# Altium PCB PCB1.PcbDoc
Units mil, origin at the board's own origin, x right, y up, seen from the top; angles counter-clockwise.
Board outline 2677.17 x 1968.5 mil, 2 copper layers (Top Layer, Bottom Layer); 33 components, 50 nets, 227 pads, 85 vias.
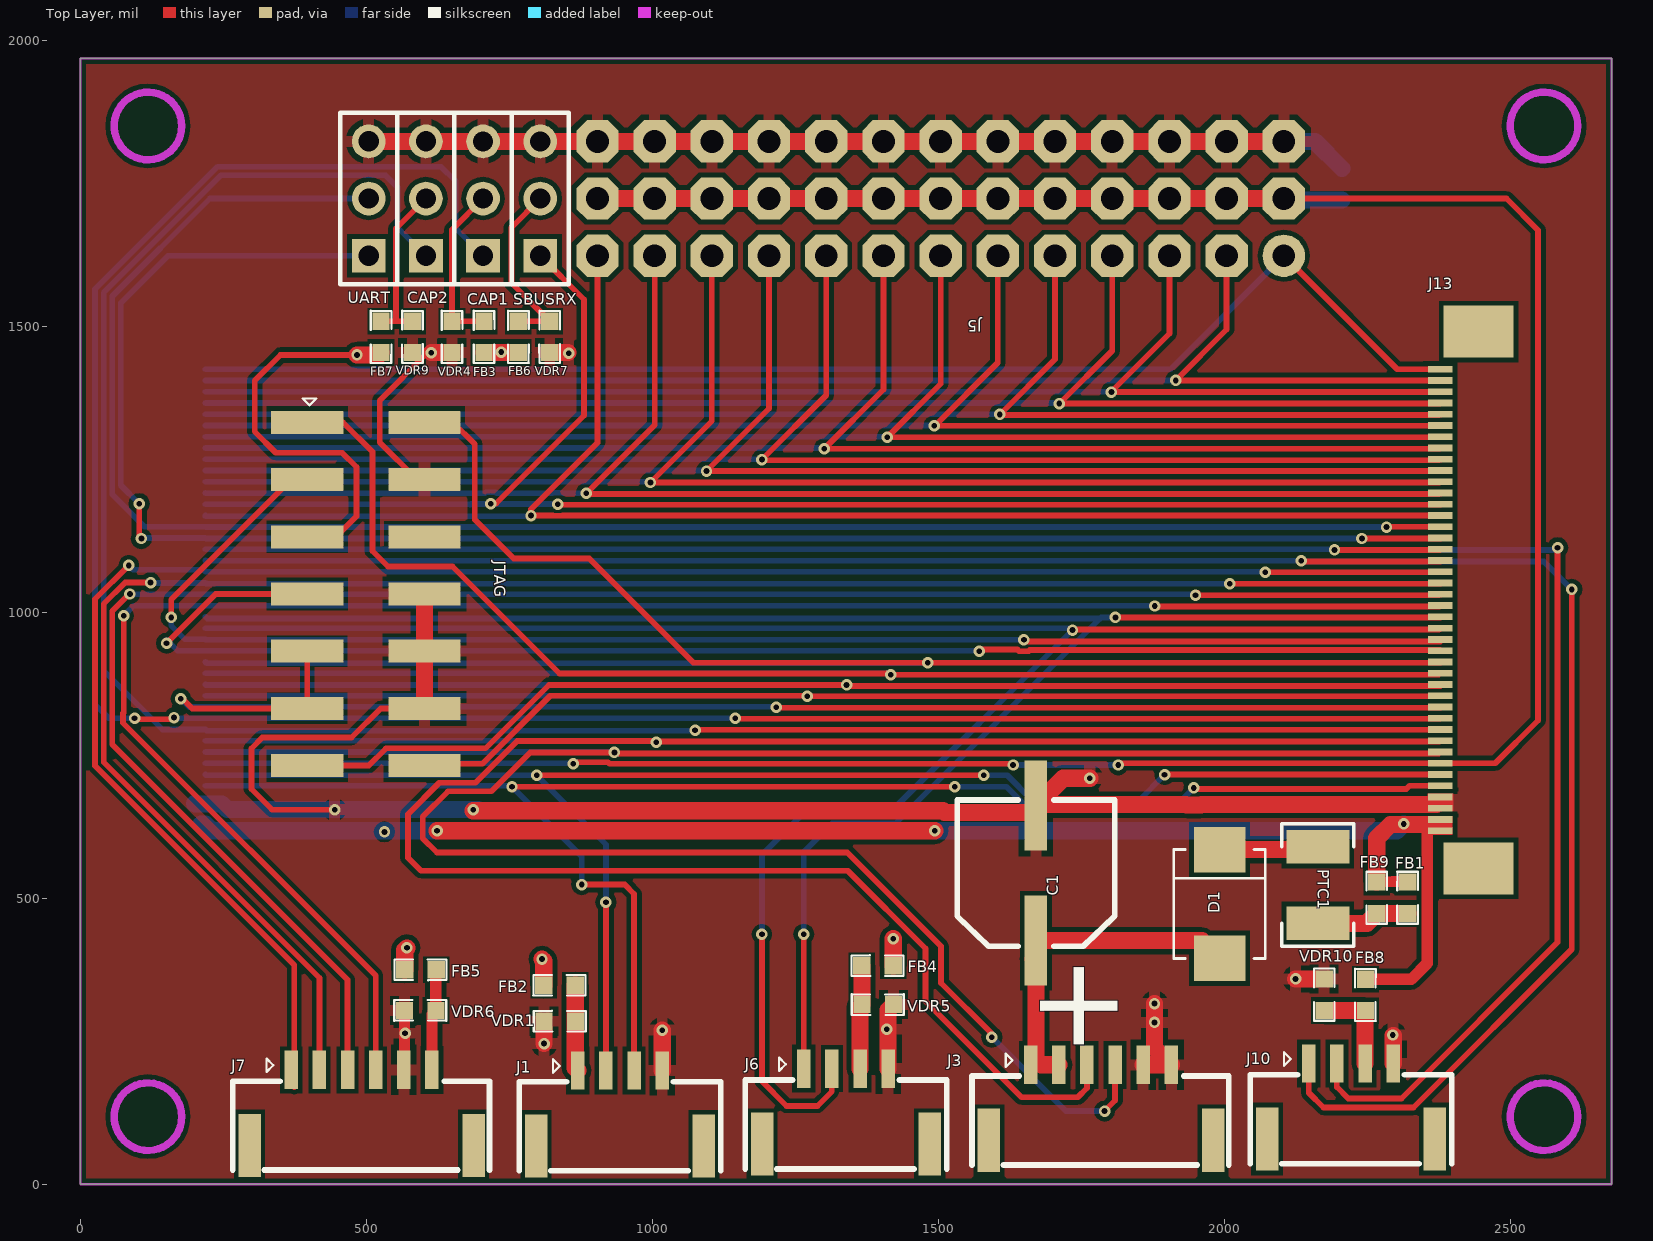
[diagram p0: Top Layer view]
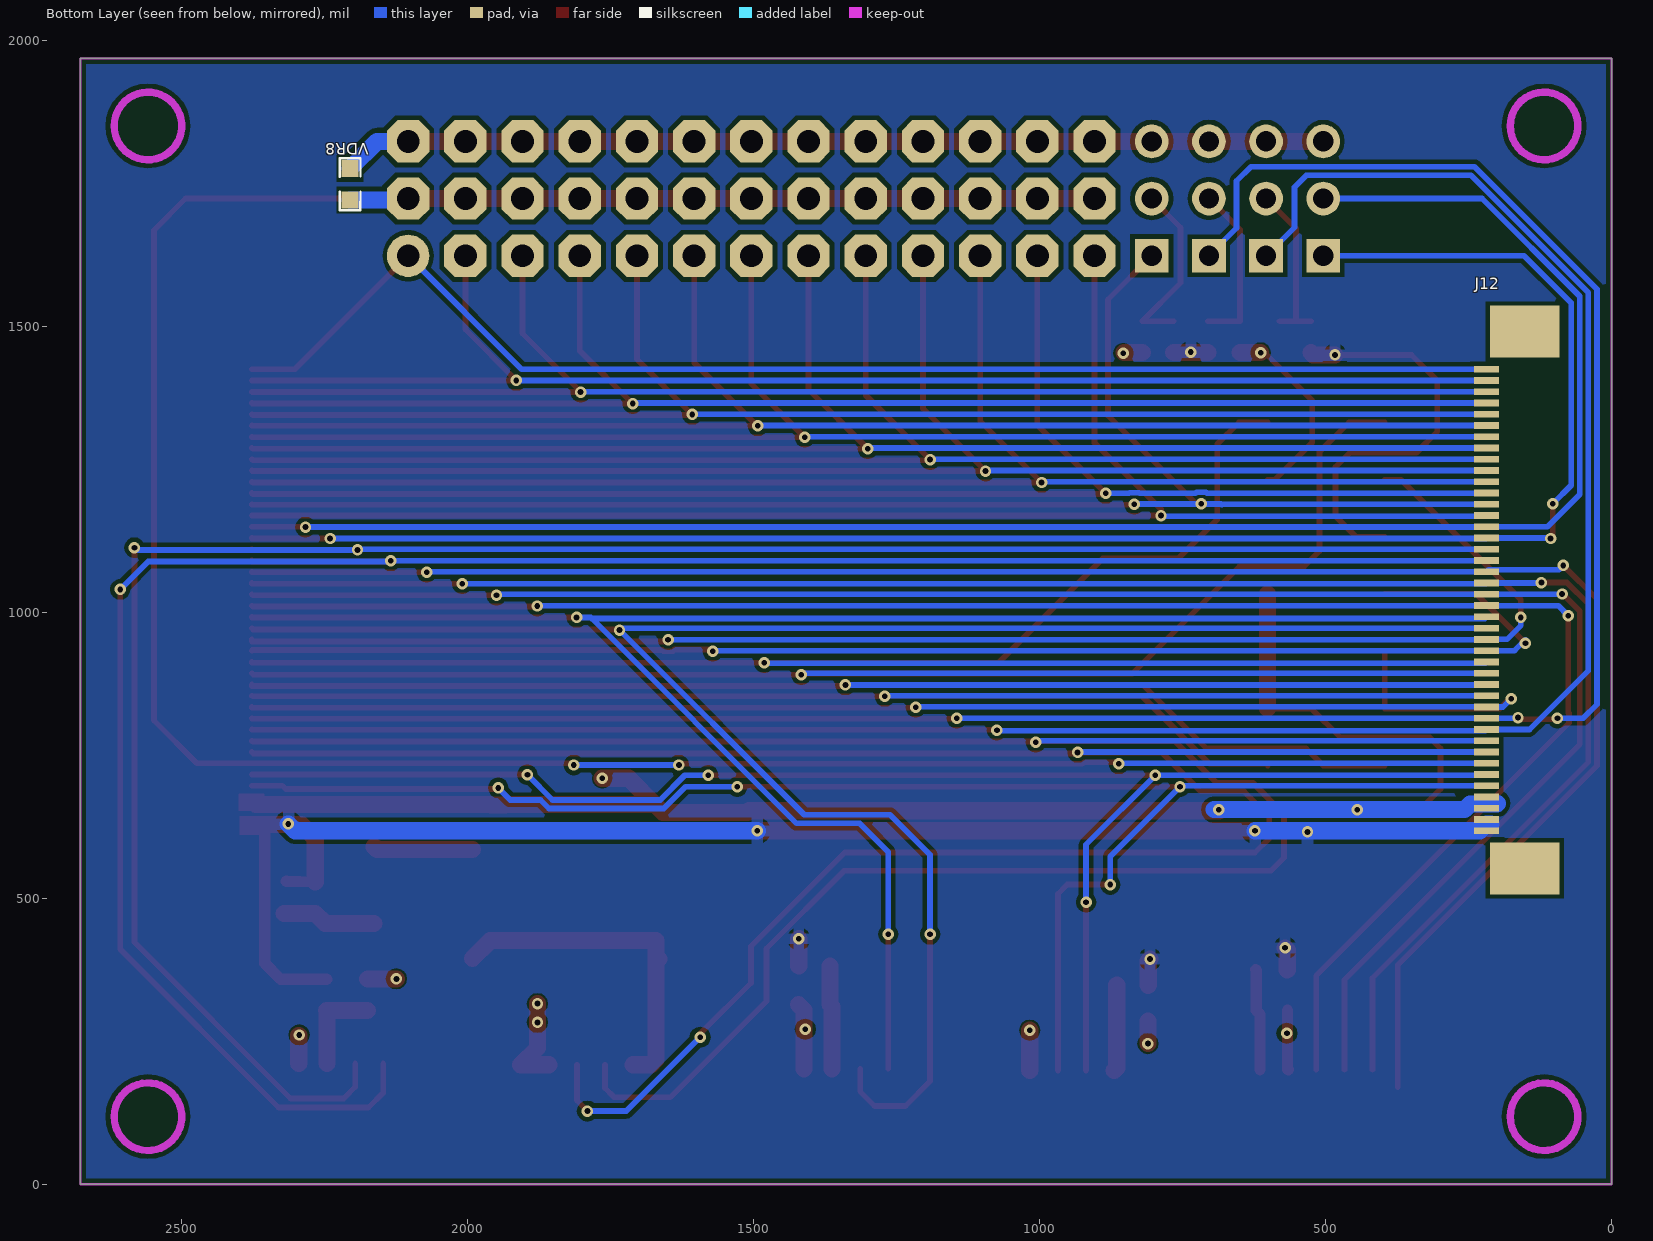
[diagram p1: Bottom Layer view, seen from below]

## Layer stack, top to bottom
Top Solder: solder mask 0.4, Solder Resist, Dk 3.5
Top Layer: signal copper 1.4
Dielectric 1: dielectric 12.6, FR-4, Dk 4.8
Bottom Layer: signal copper 1.4
Bottom Solder: solder mask 0.4, Solder Resist, Dk 3.5

## Board outline
0,0 0,1968.5 2677.17,1968.5 2677.17,0

## Design rules (kind name [scope] priority, off if disabled: settings)
Clearance [All] p1: gap=5
HoleToHoleClearance [All] p1: gap=0 allowstackedmicrovias=TRUE
MinimumSolderMaskSliver [All] p1: minsoldermaskwidth=0
PlaneConnect [All] p1: planeconnectstyle=Relief reliefexpansion=20 reliefentries=4 reliefconductorwidth=20 reliefairgap=10
PolygonConnect [All] p1: connectstyle=Relief reliefconductorwidth=20 reliefentries=4 polygonreliefangle="90 Angle" airgapwidth=10
RoutingVias [All] p1: holewidth=10 width=20 viastyle="Through Hole" minholewidth=10 minwidth=20 maxholewidth=10 maxwidth=20
SilkToSilkClearance [All] p1: silktosilkclearance=0
SilkToSolderMaskClearance [IsPad] p1: minsilkscreentomaskgap=0 clearancetoexposedcopper=TRUE
SolderMaskExpansion [All] p1: expansion=4
UnpouredPolygon [All] p1: allowunpoured=FALSE
Width [All] p1: maxlimit=30 minlimit=10 preferedwidth=10
24 further rules are at their usual default settings.

## Components (designator, comment, footprint, x,y, rotation, side; value= is the part's Value field where it differs from the comment)
C1 "220uF/16V" 6.3*7.7/H/220u 1670.65,544.06 r270 top
CAP1 "CAP1" SIP3 704.05,1623.42 r90 top (schematic designator J4)
CAP2 "CAP2" SIP3 604.06,1623.43 r90 top (schematic designator J9)
D1 "SK52B" SMB/DO-214AA 1991.65,395.06 r90 top
FB1 "742792625" 0603-FB 2320.65,501.06 r90 top
FB2 "742792625" 0603-FB 837.65,348.06 r180 top
FB3 "742792625" 0603-FB 705.65,1481.56 r270 top
FB4 "742792625" 0603-FB 1393.65,382.06 r0 top
FB5 "742792625" 0603-FB 594.65,375.06 r180 top
FB6 "742792625" 0603-FB 765.65,1481.56 r270 top
FB7 "742792625" 0603-FB 525.65,1481.56 r270 top
FB8 "742792625" 0603-FB 2246.65,331.06 r90 top
FB9 "742792625" 0603-FB 2266.65,501.06 r90 top
J1 "CAN" GH1.25-4 869.65,199.06 r0 top
J3 "POWER_5V" GH1.25-6 1661.39,208.85 r0 top
J5 "HEAD3X12" 3X13RA 1455.82,2184.8 r270 top
J6 "I2C" GH1.25-4 1264.65,202.06 r0 top
J7 "iSensor" GH1.25-6 368.65,200.06 r0 top
J10 "UART" GH1.25-4 2147.65,211.06 r0 top
J12 "HEAD1X42" FPC0.5-42 218.65,618.06 r90 bottom
J13 "HEAD1X42" FPC0.5-42 2377.65,618.06 r90 top
JTAG "JTAG" IDC14-SMD 396.65,1332.06 r0 top (schematic designator J11)
PTC1 "0ZCH0150FF2E" 1210 2163.65,590.06 r270 top
SBUSRX "SBUS" SIP3 804.05,1623.42 r90 top (schematic designator J8)
UART "UART" SIP3 504.06,1623.43 r90 top (schematic designator J2)
VDR1 "82536040" 0603R 810.65,285.06 r0 top
VDR4 "82536040" 0603R 649.65,1509.06 r270 top
VDR5 "82536040" 0603R 1421.65,314.06 r180 top
VDR6 "82536040" 0603R 566.65,304.06 r0 top
VDR7 "82536040" 0603R 820.65,1454.04 r90 top
VDR8 "82536070/9V" 0603R 2205.65,1776.06 r270 bottom
VDR9 "82536040" 0603R 580.65,1454.04 r90 top
VDR10 "82536040" 0603R 2174.65,359.06 r270 top

## Footprints (in the part's own frame and the unit in brackets; to place one, negate y for a bottom-side part, rotate by r counter-clockwise, add the part's x,y. Pads: shape width x height; smd on the part's side, far side on the other; paste and mask are expansions set on the pad)
3X13RA [mil]
  round 74 hole 40: 1(561.38,648.23)
  oct 74x74 hole 40: 2(461.38,648.23) 3(361.38,648.23) 4(561.38,548.23) 5(461.38,548.23) 6(361.38,548.23) 7(561.38,448.23) 8(461.38,448.23) 9(361.38,448.23) 10(561.38,348.23) 11(461.38,348.23) 12(361.38,348.23) 13(561.38,248.23) 14(461.38,248.23) 15(361.38,248.23) 16(561.38,148.23) 17(461.38,148.23) 18(361.38,148.23) 19(561.38,48.23) 20(461.38,48.23) 21(361.38,48.23) 22(561.38,-51.77) 23(461.38,-51.77) 24(361.38,-51.77) 25(561.38,-151.77) 26(461.38,-151.77) 27(361.38,-151.77) 28(561.38,-251.77) 29(461.38,-251.77) 30(361.38,-251.77) 31(561.38,-351.77) 32(461.38,-351.77) 33(361.38,-351.77) 34(561.38,-451.77) 35(461.38,-451.77) 36(361.38,-451.77) 37(561.38,-551.77) 38(461.38,-551.77) 39(361.38,-551.77)
6.3*7.7/H/220u [mm]
  rect 4x1 smd: 1(3,0) 2(-3,0)
  silkscreen extent -3.25,-3.5 3.25,3.5
0603-FB [mil]
  rect 30x30 smd: 1(-27.5,0) 2(27.5,0)
  silkscreen extent -46,-18 46,18
0603R [mil]
  rect 30x30 smd: 1(0,0) 2(55,0)
  silkscreen extent -18,-18 73,18
1210 [mm]
  rect 1.5x2.8 smd: 1(0,0) 2(3.4,0)
  silkscreen extent -1.02,-1.6 4.42,1.6
FPC0.5-42 [mm]
  rect 2.3x3.1 smd: 0(-1.67,-1.7) 0(22.17,-1.7)
  rect 0.3x1.1 smd: 1(0,0) 2(0.5,0) 3(1,0) 4(1.5,0) 5(2,0) 6(2.5,0) 7(3,0) 8(3.5,0) 9(4,0) 10(4.5,0) 11(5,0) 12(5.5,0) 13(6,0) 14(6.5,0) 15(7,0) 16(7.5,0) 17(8,0) 18(8.5,0) 19(9,0) 20(9.5,0) 21(10,0) 22(10.5,0) 23(11,0) 24(11.5,0) 25(12,0) 26(12.5,0) 27(13,0) 28(13.5,0) 29(14,0) 30(14.5,0) 31(15,0) 32(15.5,0) 33(16,0) 34(16.5,0) 35(17,0) 36(17.5,0) 37(18,0) 38(18.5,0) 39(19,0) 40(19.5,0) 41(20,0) 42(20.5,0)
GH1.25-4 [mm]
  rect 1x2.8 smd: 0(-1.85,-3.35) 0(5.6,-3.35)
  rect 0.6x1.7 smd: 1(0,0) 2(1.25,0) 3(2.5,0) 4(3.75,0)
  silkscreen extent -2.6,-4.45 6.35,0.5
GH1.25-6 [mm]
  rect 1x2.8 smd: 0(-1.85,-3.35) 0(8.1,-3.35)
  rect 0.6x1.7 smd: 1(0,0) 2(1.25,0) 3(2.5,0) 4(3.75,0) 5(5,0) 6(6.25,0)
  silkscreen extent -2.6,-4.45 8.8,0.5
IDC14-SMD [mm]
  rect 3.2x1.02 smd: 1(0,0) 2(5.2,0) 3(0,-2.54) 4(5.2,-2.54) 5(0,-5.08) 6(5.2,-5.08) 7(0,-7.62) 8(5.2,-7.62) 9(0,-10.16) 10(5.2,-10.16) 11(0,-12.7) 12(5.2,-12.7) 13(0,-15.24) 14(5.2,-15.24)
  silkscreen extent -0.2,0.76 0.4,1.06
SIP3 [mm]
  rect 1.5x1.5 hole 0.9: 1(0,0)
  round 1.5 hole 0.9: 2(2.54,0) 3(5.08,0)
  silkscreen extent -1.27,-1.27 6.35,1.27
SMB/DO-214AA [mil]
  rect 80x90 smd: 1(0,0) 2(190,0)
  silkscreen extent 0,-80 190,80

## Part data
C1: library part C-POLAR
CAP1 CAP2 SBUSRX UART: library part HEAD1X3
D1: library part "DIODE SCHOTTKY"
FB1 FB2 FB3 FB4 FB5 FB6 FB7 FB8 FB9: library part FB
J1 J6 J10: library part HEAD1X4
J3 J7: library part HEAD1X6
JTAG: library part IDC-14
PTC1: library part PTC
VDR1 VDR4 VDR5 VDR6 VDR7 VDR8 VDR9 VDR10: library part Varistor

## Via types
v1: diameter 20, hole 10, Top Layer to Bottom Layer, 85 vias

## Nets (pads, with @x,y where several pads share a name; then routed paths per layer and width w, separated by ;. In a path a pad name is that pad's centre, name@x,y a point inside that pad or via, vN(x,y) a via of type N, cw(c..) or ccw(c..) an arc to the next point about the centre after c; other vN are vias at no path point)
BAT2S_VOLT: J5.2 J5.5 J5.8 J5.11 J5.14 J5.17 J5.20 J5.23 J5.26 J5.29 J5.32 J5.35 J5.38 J12.7 J13.7 VDR8.2 | length 4993.2
  Top Layer w10: v1(861.65,735.06) 864.65,738.06 922.36,738.06 925.36,735.06 1628.65,735.06 v1(1630.65,733.06) ; v1(1814.65,733.06) 1817.76,736.17 J13.7 2473.76,736.17 2548.65,811.06 2548.65,1668.06 2493.28,1723.42 J5.2
  Top Layer w30: J5.38 J5.35 J5.32 J5.29 J5.26 J5.23 J5.20 J5.17 J5.14 J5.11 J5.8 J5.5 J5.2
  Bottom Layer w10: J12.7 860.54,736.17 v1(861.65,735.06) ; v1(1630.65,733.06) v1(1814.65,733.06) ; J5.2 J5.2@2106.41,1721.06
  Bottom Layer w30: J5.2@2106.41,1721.06 VDR8.2
BAT6S_VOLT_SENSE: J3.4 J12.8 J13.8 | length 4099.9
  Top Layer w10: v1(1593.65,257.06) 1593.65,263.06 1504.65,352.06 1504.65,416.06 1340.65,580.06 623.29,580.06 598.65,604.7 598.65,643.06 642.57,686.98 718.28,686.98 786.36,755.06 v1(933.65,755.06) 935.65,753.06 2374.85,753.06 J13.8 ; v1(1790.65,128.06) 1809.03,146.44 J3.4
  Bottom Layer w10: J12.8 932.85,755.85 v1(933.65,755.06) ; v1(1593.65,257.06) 1722.65,128.06 v1(1790.65,128.06)
BAT_CURRENT_SENSE: J3.3 J12.9 J13.9 | length 4186.9
  Top Layer w10: J3.3 1759.82,168.23 1743.65,152.06 1645.65,152.06 1477.65,320.06 1477.65,412.12 1341.71,548.06 595.65,548.06 572.65,571.06 572.65,647.06 627.57,701.98 690.57,701.98 763.65,775.06 1004.65,775.06 v1(1006.65,773.06) 1007.65,774.06 2376.17,774.06 J13.9
  Bottom Layer w10: J12.9 1004.17,775.54 v1(1006.65,773.06)
CANTH: J1.2 J12.6 J13.6 | length 2762.1
  Top Layer w10: v1(797.65,715.06) v1(1579.65,715.06) ; J1.2 v1(918.86,493.27) ; v1(1895.65,716.06) 1896.07,716.48 J13.6
  Bottom Layer w10: J12.6 220.07,715.06 v1(797.65,715.06) 918.86,593.84 v1(918.86,493.27) ; v1(1579.65,715.06) 1620.36,715.06 1663.42,672 1851.59,672 v1(1895.65,716.06)
CANTL: J1.3 J12.5 J13.5 | length 2822
  Top Layer w10: v1(754.65,695.06) v1(1528.65,695.06) ; v1(876.65,524.06) 951.65,524.06 968.07,507.63 J1.3 ; v1(1946.65,693.06) 1948.65,691.06 2318.22,691.06 2323.96,696.8 J13.5
  Bottom Layer w10: J12.5 752.91,696.8 v1(754.65,695.06) 876.65,573.06 v1(876.65,524.06) ; v1(1528.65,695.06) 1619.15,695.06 1657.2,657 1857.8,657 1872.86,672.06 1925.65,672.06 v1(1946.65,693.06)
CAP1: CAP1.1 J12.11 J13.11 | length 3970
  Top Layer w10: v1@94.65,813.06 160.65,813.06 v1(163.65,816.06) ; v1(1144.8,814.91) 1145.65,814.06 2376.8,814.06 J13.11
  Bottom Layer w10: v1(94.65,815.06) 49.65,815.06 25.65,839.06 25.65,1565.06 239.65,1779.06 630.65,1779.06 655.65,1754.06 655.65,1671.82 CAP1.1 ; v1(163.65,816.06) 164.8,814.91 J12.11 v1(1144.8,814.91)
CAP2: CAP2.1 J12.10 J13.10 | length 3790.1
  Top Layer w10: v1(1074.65,794.06) 1075.5,794.91 2377.65,794.91 J13.10
  Bottom Layer w10: CAP2.1 554.43,1673.06 554.43,1743.27 533.65,1764.06 245.86,1764.06 40.65,1558.84 40.65,898.06 143.48,795.22 J12.10 220.81,793.06 1073.65,793.06 v1(1074.65,794.06)
EMU0: J12.14 J13.14 JTAG.13 | length 3164.5
  Top Layer w10: JTAG.13 504.16,732.06 534.24,762.13 708.3,762.13 819.22,873.06 v1(1339.65,873.06) 1341.65,871.06 2377.65,871.06 J13.14
  Bottom Layer w10: J12.14 219.55,873.06 v1(1339.65,873.06)
EMU1: J12.13 J13.13 JTAG.14 | length 2882
  Top Layer w10: JTAG.14 601.37,735.06 702.43,735.06 821.43,854.06 1269.65,854.06 v1(1270.65,853.06) 2376.43,853.06 J13.13
  Bottom Layer w10: J12.13 1269.43,854.28 v1(1270.65,853.06)
GND: C1.2 CAP1.3 CAP2.3 J1.4 J3.5 J3.6 J5.3 J5.6 J5.9 J5.12 J5.15 J5.18 J5.21 J5.24 J5.27 J5.30 J5.33 J5.36 J5.39 J6.4 J7.5 J10.4 J12.3 J12.4 J13.3 J13.4 JTAG.4 JTAG.8 JTAG.10 JTAG.12 SBUSRX.3 UART.3 VDR1.1 VDR4.2 VDR5.1 VDR6.1 VDR7.1 VDR8.1 VDR9.1 VDR10.1 | length 5763.9
  Top Layer w10: v1(444.65,655.06) 334.94,655.06 299,691 299,762 318,781 474,781 525.06,832.06 JTAG.12 ; JTAG.4 588.3,1232.06 523.38,1296.98 523.38,1370.38 607.04,1454.04 v1(613.65,1454.04) ; v1@852.66,1454.04 v1(853.65,1453.06) ; v1(2294.65,261.06) v1@2295.28,260.42
  Top Layer w20: J7.5 566.65,201.2 VDR6.1
  Top Layer w30: UART.3 CAP2.3 J5.3 ; JTAG.12 JTAG.10 JTAG.8 ; v1(613.65,1454.04) VDR4.2 ; v1@686.65,653.06 1508.14,653.06 1511.14,650.06 1658.54,650.06 C1.2 C1.2@1672.54,664.06 ; v1(810.65,246.06) VDR1.1 ; VDR7.1 v1@852.66,1454.04 ; J1.4 v1(1017.28,269.42) ; J6.4 1412.28,304.69 VDR5.1 ; v1(1765,710) 1718.48,710 C1.2@1672.54,664.06 ; J3.5 J3.6 1878,238.31 v1(1878,316) ; v1(2124.65,359.06) VDR10.1 ; J10.4 v1@2295.28,260.42 ; 2374.65,668.06 2370.65,664.06 1960.07,664.06 1959.07,663.06 1934.22,663.06 1933.22,664.06 C1.2@1672.54,664.06
  Bottom Layer w30: 199.65,666.06 200.65,665.06 247.17,665.06 257.17,655.06 v1(444.65,655.06) v1(686.65,655.06) v1@694.65,655.06 ; J5.3 2158.28,1823.42 VDR8.1
  other v1: 567.65,264.06 1409.65,271.06 1878,283
I\S\E\N\S\O\R\_\C\S\: J7.4 J12.21 J13.21 | length 3288.1
  Top Layer w10: v1(75.65,994.06) 75.65,824.34 74.65,823.34 74.65,806.77 516.28,365.13 J7.4 ; v1(1878.65,1011.06) 1879.65,1010.06 2375.94,1010.06 J13.21
  Bottom Layer w10: v1(75.65,994.06) 93.35,1011.76 J12.21 1877.94,1011.76 v1(1878.65,1011.06)
ISENSOR_CLK: J7.3 J12.22 J13.22 | length 3314.1
  Top Layer w10: v1(86.65,1032.06) 85.36,1032.06 55.65,1002.34 55.65,769.06 467.07,357.63 J7.3 ; v1@1953.65,1034.06 v1(1949.65,1030.06) 2376.26,1030.06 J13.22
  Bottom Layer w10: v1(86.65,1032.06) 87.26,1031.44 J12.22 1948.26,1031.44 v1(1949.65,1030.06)
ISENSOR_SIMO: J7.1 J12.24 J13.24 | length 3379
  Top Layer w10: v1(84.65,1082.06) 25.65,1023.06 25.65,731.84 374.02,383.47 J7.1@374.02,170.1 ; v1(2071.65,1070.06) 2376.89,1070.06 J13.24
  Bottom Layer w10: v1(84.65,1082.06) 92.11,1074.59 214.87,1074.59 J12.24 2070.89,1070.81 v1(2071.65,1070.06)
ISENSOR_SOMI: J7.2 J12.23 J13.23 | length 3325.1
  Top Layer w10: v1(122.65,1052.06) 78.36,1052.06 40.65,1014.34 40.65,738.06 417.86,360.84 J7.2 ; v1(2009.65,1050.06) 2377.65,1050.06 J13.23
  Bottom Layer w10: v1(122.65,1052.06) 123.57,1051.13 J12.23 219.72,1050.06 v1(2009.65,1050.06)
NetFB1_1: FB1.1 FB9.1 PTC1.2 | length 164.2
  Top Layer w30: PTC1.2 2249.29,456.2 FB9.1 FB1.1
NetFB2_1: FB2.1 J1.1 VDR1.2 | length 150.9
  Top Layer w30: FB2.1 865.15,203.56 J1.1
NetFB3_1: CAP1.2 FB3.1 VDR4.1 | length 292.9
  Top Layer w10: CAP1.2 649.65,1669.02 VDR4.1 FB3.1
NetFB4_1: FB4.1 J6.3 VDR5.2 | length 181.7
  Top Layer w10: VDR5.2@1363.07,310.48 VDR5.2 ; FB4.1 FB4.1@1366.65,381.56
  Top Layer w30: J6.3 VDR5.2@1363.07,310.48 ; VDR5.2 FB4.1@1366.65,381.56
NetFB5_1: FB5.1 J7.6 VDR6.2 | length 178.1
  Top Layer w20: J7.6 614.71,297.12 VDR6.2 621.65,374.55 FB5.1
NetFB6_1: FB6.1 SBUSRX.2 VDR7.2 | length 318
  Top Layer w10: FB6.1 VDR7.2 753.65,1576.04 753.65,1673.02 SBUSRX.2
NetFB7_1: CAP2.2 FB7.1 VDR9.2 | length 291.1
  Top Layer w10: FB7.1 551.65,1509.06 ; VDR9.2 551.65,1509.06 ; CAP2.2 551.65,1671.02 551.65,1509.06
NetFB8_1: FB8.1 J10.3 VDR10.2 | length 164.9
  Top Layer w10: VDR10.2 VDR10.2@2175.15,303.56 ; FB8.1@2246.07,302.98 FB8.1
  Top Layer w30: VDR10.2@2175.15,303.56 FB8.1 ; J10.3 FB8.1@2246.07,302.98
PWM1: J5.1 J12.42 J13.42 | length 2323.3
  Top Layer w10: J5.1 2302.32,1425.14 J13.42
  Bottom Layer w10: J12.42 1905.77,1425.14 J5.1
PWM2: J5.4 J12.41 J13.41 | length 2413.8
  Top Layer w10: J5.4 2004.05,1494.46 v1(1915.05,1405.46) J13.41
  Bottom Layer w10: J12.41 v1(1915.05,1405.46)
PWM3: J5.7 J12.40 J13.40 | length 2440.2
  Top Layer w10: J5.7 1904.05,1487.46 1802.65,1386.06 v1(1802.65,1385.06) 2376.93,1385.06 J13.40
  Bottom Layer w10: J12.40 1802.36,1385.77 1802.36,1385.34 v1(1802.65,1385.06)
PWM4: J5.10 J12.39 J13.39 | length 2456.5
  Top Layer w10: J5.10 1804.05,1457.46 v1(1711.65,1365.06) 2376.61,1365.06 J13.39
  Bottom Layer w10: J12.39 1710.61,1366.09 v1(1711.65,1365.06)
PWM5: J5.13 J12.38 J13.38 | length 2477.4
  Top Layer w10: J5.13 1704.05,1442.46 v1(1607.65,1346.06) 1608.65,1345.06 2376.3,1345.06 J13.38
  Bottom Layer w10: J12.38 1607.3,1346.4 v1(1607.65,1346.06)
PWM6: J5.16 J12.37 J13.37 | length 2502.6
  Top Layer w10: v1(1492.65,1326.06) v1@1493.65,1326.06 ; J5.16 1604.05,1436.46 v1@1493.65,1326.06 ; J13.37 2376.98,1326.06 v1@1493.65,1326.06
  Bottom Layer w10: J12.37 1491.98,1326.72 v1(1492.65,1326.06)
PWM7: J5.19 J12.36 J13.36 | length 2515.9
  Top Layer w10: J5.19 1504.05,1399.46 v1(1410.65,1306.06) 2376.67,1306.06 J13.36
  Bottom Layer w10: J12.36 1409.67,1307.03 v1(1410.65,1306.06)
PWM8: J5.22 J12.35 J13.35 | length 2540.3
  Top Layer w10: J5.22 1404.05,1389.46 v1(1300.65,1286.06) 2376.35,1286.06 J13.35
  Bottom Layer w10: J12.35 1299.35,1287.35 v1(1300.65,1286.06)
PWM9: J5.25 J12.34 J13.34 | length 2563.3
  Top Layer w10: J5.25 1304.05,1379.46 v1(1191.65,1267.06) 1192.65,1266.06 2376.04,1266.06 J13.34
  Bottom Layer w10: J12.34 1191.04,1267.66 v1(1191.65,1267.06)
PWM10: J5.28 J12.33 J13.33 | length 2581.4
  Top Layer w10: J5.28 1204.05,1356.46 v1(1094.65,1247.06) 2376.72,1247.06 J13.33
  Bottom Layer w10: J12.33 1093.72,1247.98 v1(1094.65,1247.06)
PWM11: J5.31 J12.32 J13.32 | length 2600.9
  Top Layer w10: J5.31 1104.05,1334.46 v1(996.65,1227.06) 2376.41,1227.06 J13.32
  Bottom Layer w10: J12.32 995.41,1228.29 v1(996.65,1227.06)
PWM12: J5.34 J12.31 J13.31 | length 2627.6
  Top Layer w10: J5.34 1004.05,1327.46 v1(884.65,1208.06) 885.65,1207.06 2376.09,1207.06 J13.31
  Bottom Layer w10: J12.31 219.2,1208.06 707.36,1208.06 709.36,1210.06 725.93,1210.06 727.93,1208.06 825.37,1208.06 826.36,1209.04 842.93,1209.04 843.92,1208.06 v1(884.65,1208.06)
SBUS_RX: J12.30 J13.30 SBUSRX.1 | length 2699.2
  Top Layer w10: v1(717.65,1190.06) 726.65,1190.06 880.65,1344.06 880.65,1546.82 SBUSRX.1 ; v1@833.65,1189.06 834.65,1188.06 2377.65,1188.06 J13.30
  Bottom Layer w10: J12.30 680.78,1188.92 681.65,1188.06 682.83,1189.24 v1@833.83,1189.24
  other v1: 834.65,1189.04
SBUS_TX: J5.37 J12.29 J13.29 | length 2663.2
  Top Layer w10: J5.37 904.05,1296.46 787.83,1180.24 v1(787.83,1169.24) 826.17,1169.24 826.36,1169.04 842.93,1169.04 843.12,1169.24 J13.29
  Bottom Layer w10: J12.29 218.65,1168.06 786.65,1168.06 v1(787.83,1169.24)
SCIRXA: J12.27 J13.27 UART.1 | length 3166.9
  Top Layer w10: v1(102.65,1190.06) 102.65,1133.06 v1(106.65,1129.06) ; v1(2240.65,1129.06) 2377.65,1129.06 J13.27
  Bottom Layer w10: v1(102.65,1190.06) 70.65,1222.06 70.65,1541.06 153.02,1623.43 UART.1 ; v1(106.65,1129.06) 107.46,1129.87 J12.27 219.46,1129.06 v1(2240.65,1129.06)
SCIRXC: J10.1 J12.25 J13.25 | length 3920.3
  Top Layer w10: v1(2134.65,1090.06) 2135.65,1089.06 2377.65,1089.06 J13.25 ; J10.1 2147.65,160.06 2173.65,134.06 2330.65,134.06 2607.65,411.06 v1(2607.65,1040.06)
  Bottom Layer w10: J12.25 219.09,1090.06 v1(2134.65,1090.06) 2135.65,1089.06 2558.65,1089.06 v1(2607.65,1040.06)
SCITXA: J12.28 J13.28 UART.2 | length 3211.7
  Top Layer w10: v1(2283.65,1149.06) 2284.14,1149.55 J13.28
  Bottom Layer w10: UART.2 226.45,1723.43 55.65,1552.63 55.65,1206.06 112.15,1149.55 J12.28 218.65,1149.24 2283.46,1149.24 v1(2283.65,1149.06)
SCITXC: J10.2 J12.26 J13.26 | length 3789.9
  Top Layer w10: v1(2192.65,1109.06) 2376.52,1109.06 J13.26 ; J10.2 2196.86,169.84 2216.65,150.06 2309.65,150.06 2582.65,423.06 v1(2582.65,1113.06)
  Bottom Layer w10: J12.26 2191.52,1110.18 v1(2192.65,1109.06) 2578.65,1109.06 v1(2582.65,1113.06)
SCL: J6.2 J12.19 J13.19 | length 3453.8
  Top Layer w10: v1(1191.65,437.06) 1191.65,180.06 1234.65,137.06 1288.65,137.06 1313.86,162.27 J6.2 ; v1(1734.65,969.06) 1735.65,970.06 2375.31,970.06 J13.19
  Bottom Layer w10: J12.19 1731.32,972.39 v1(1734.65,969.06) 1411.65,646.06 1261.65,646.06 1191.65,576.06 v1(1191.65,437.06)
SDA: J6.1 J12.20 J13.20 | length 3228.4
  Top Layer w10: J6.1 v1(1264.65,437.06) ; v1(1809.65,991.06) 2377.65,991.06 J13.20
  Bottom Layer w10: J12.20 221.66,989.06 1782.93,989.06 ; v1(1264.65,437.06) 1264.65,581.06 1314.65,631.06 1424.93,631.06 1782.93,989.06 ; v1(1809.65,991.06) 1784.93,991.06 1782.93,989.06
T\R\S\T\: J12.16 J13.16 JTAG.2 | length 3293.2
  Top Layer w10: JTAG.2 651.65,1332.06 689.65,1294.06 689.65,1162.06 757.65,1094.06 889.65,1094.06 1071.65,912.06 v1(1481.65,912.06) 2377.65,912.06 J13.16
  Bottom Layer w10: J12.16 220.92,911.06 1480.65,911.06 v1(1481.65,912.06)
TCK: J12.12 J13.12 JTAG.9 JTAG.11 | length 2542.8
  Top Layer w10: v1(175.65,849.06) 175.65,852.06 195.65,832.06 JTAG.11 JTAG.9 ; v1(1216.65,834.06) 1217.65,833.06 2377.65,833.06 J13.12
  Bottom Layer w10: v1(175.65,849.06) 190.11,834.59 J12.12 219.11,835.06 1215.65,835.06 v1(1216.65,834.06)
TDI: J12.18 J13.18 JTAG.3 | length 2604.2
  Top Layer w10: v1(158.65,991.06) 158.65,1022.06 368.65,1232.06 JTAG.3 ; v1(1649.65,952.06) 1652.65,949.06 2377.65,949.06 J13.18
  Bottom Layer w10: v1(158.65,991.06) 158.65,977.06 183,952.7 J12.18 219.29,952.06 v1(1649.65,952.06)
TDO: J12.17 J13.17 JTAG.7 | length 2526.7
  Top Layer w10: v1(150.65,946.06) 236.65,1032.06 JTAG.7 ; v1(1571.65,932.06) 1574.65,935.06 1638.36,935.06 1641.36,932.06 1657.93,932.06 1659.93,934.06 2376.61,934.06 J13.17
  Bottom Layer w10: v1(150.65,946.06) 150.65,952.06 169.69,933.02 J12.17 1570.69,933.02 v1(1571.65,932.06)
TMS: J12.15 J13.15 JTAG.1 | length 3465.5
  Top Layer w10: JTAG.1 459.28,1332.06 510.65,1280.69 510.65,1107.06 537.65,1080.06 650.58,1080.06 837.58,893.06 1414.65,893.06 v1(1416.65,891.06) 2375.06,891.06 J13.15
  Bottom Layer w10: J12.15 1414.06,893.65 v1(1416.65,891.06)
V5: D1.2 PTC1.1 | length 174.1
  Top Layer w30: D1.2 2158.65,585.06 PTC1.1
V5V3: C1.1 D1.1 J3.1 J3.2 | length 592.7
  Top Layer w30: C1.1@1665.5,394.06 C1.1@1670.65,399.2 ; J3.2 1679.9,208.85 1670.65,218.1 C1.1@1670.65,399.2 ; D1.1 1960.76,425.94 C1.1 C1.1@1670.65,399.2
VDD5_PERIPH: FB1.2 FB2.2 FB3.2 FB4.2 FB5.2 FB6.2 FB7.2 FB8.2 FB9.2 J12.1 J12.2 J13.1 J13.2 JTAG.5 | length 3667
  Top Layer w10: JTAG.5 446.65,1132.06 482.65,1168.06 482.65,1254.06 457.65,1279.06 341.65,1279.06 304.65,1316.06 304.65,1405.06 349.65,1450.06 v1(483.65,1450.06) ; 2347.65,629.06 2354.9,621.81
  Top Layer w20: FB8.2 2327.15,358.56 2354.9,386.31 2354.9,621.81 ; FB9.2 FB1.2@2317.65,529.56
  Top Layer w30: v1(483.65,1450.06) 521.65,1450.06 FB7.2 ; FB5.2 567.15,409.67 v1(570.87,413.39) ; v1(623.65,618.06) v1(1493.65,618.06) ; FB3.2 FB6.2 ; v1(807.09,393.7) 810.15,390.64 FB2.2 ; FB4.2 v1(1421.15,429.25) ; FB9.2 2266.65,605.05 2290.65,629.06 2347.65,629.06 2372.65,629.06
  Bottom Layer w10: 210.96,630.06 J12.2 218.65,630.06 J12.1
  Bottom Layer w30: 210.96,630.06 218.65,630.06 230.65,618.06 v1(623.65,618.06) ; v1(1493.65,618.06) 2301.65,618.06 v1(2313.65,630.06)
  other v1: 531.65,616.06 735.65,1455.04
pads on no net: J1.0 J3.0 J6.0 J7.0 J10.0 J12.0 J13.0 JTAG.6

## Polygon pours and split planes (outlines as drawn)
GND on Top Layer "Bottom Layer-No Net" (solid, remove dead copper, pour order 30): -172,2053 2984,2053 3090,1947 2925,1782 2925,-322 -507,-322 -526,-341 -145,40 -145,2056
VDD5_PERIPH on Bottom Layer "Bottom Layer-No Net" (solid, remove dead copper, pour order 32): -74,2006 2797,2006 2799,2004 2835,1968 2835,482 2835,-282 2846,-293 2747,-194 -252,-194 -252,1807 -50,2009

## Keep-outs
Keep-Out Layer:
  circle w13: c118.11,1850.39 r59.06
  circle w13: c118.11,118.11 r59.06
  circle w13: c2559.06,1850.39 r59.06
  circle w13: c2559.06,118.11 r59.06
  lines w3.94: 0,0 0,1968.5 2677.17,1968.5 2677.17,0 0,0

## Other copper
Top Layer:
  rectangle net VDD5_PERIPH: 2353.65,611.06 2398.65,644.06
  rectangle net GND: 2355.65,653.06 2400.65,683.06

## Dimensions
2677.17,1968.5 to 2677.17,0 on Keep-Out Layer
0,1968.5 to 2677.17,1968.5 on Keep-Out Layer

## Text inside footprints (layer, text, board x,y; h text height)
C1: Top Overlay "+" at 1678.52,402.32 h157.48 r270